# EAGLE board SparkFun Infrared Sensor STHS34PF80 Mini (EAGLE 9.6.2)
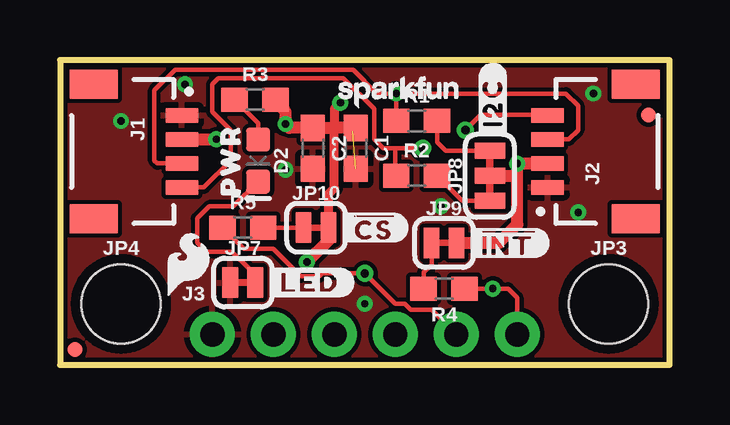
[diagram p0: board, top side]
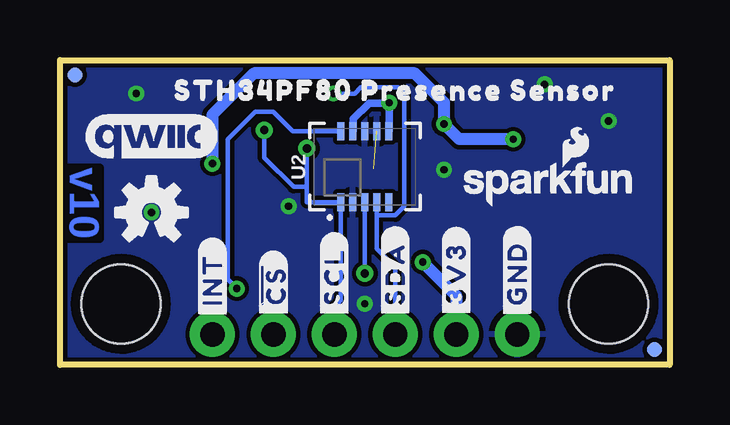
[diagram p1: board, bottom side, seen from below]

Size 25.4 x 12.7 mm. Coordinates in mm from the lower left corner, seen from the top.
Outline: 0,0 25.4,0 25.4,12.7 0,12.7 0,0
Copper layers (1*16): Top 0.035mm / dielectric 1.5mm / Bottom 0.035mm
Design rules "SparkFun-2-Layer-General-JLCPCB": minimum track width 7mil, minimum drill 0.3mm, track to track 7mil, track to pad 7mil, pad to pad 7mil, via to via 7mil, smd to smd 7mil, copper to edge 7mil, drill to drill 7mil, minimum pad ring 7mil, minimum via ring 7mil, stop-mask expansion 3mil, vias tented up to drill 25mil, thermal gap 10mil

## Footprints (pad centres in the part's own frame; a part is rotated, then mirrored left to right if it is on the bottom)
0603 = smd 1.1 x 1: 1 -0.85,0; 2 0.85,0
LED-0603 = smd 1 x 1: A -0.877,0; C 0.877,0
JST04_1MM_RA = smd 0.6 x 1.35: 1 -1.5,0; 2 -0.5,0; 3 0.5,0; 4 1.5,0 | smd 1.2 x 2: NC1 2.8,-3.675; NC2 -2.8,-3.675
1X06_NO_SILK = drill 1.016 pad 1.88: 1 0,0; 2 2.54,0; 3 5.08,0; 4 7.62,0; 5 10.16,0; 6 12.7,0
FIDUCIAL-MICRO = smd 0.635 x 0.635: 1 0,0
STAND-OFF = hole 3.302: 0,0
SMT-JUMPER_2_NC_TRACE_SILK = smd 0.66 x 1.27: 1 -0.521,0; 2 0.521,0
SMT-JUMPER_3_2-NC_TRACE_SILK = smd 0.66 x 1.27: 1 -1.041,0; 2 0,0; 3 1.041,0
OLGA-10L = smd 0.75 x 0.285: 1 -1.475,1; 2 -1.475,0.5; 3 -1.475,0; 4 -1.475,-0.5; 5 -1.475,-1; 6 1.475,-1; 7 1.475,-0.5; 8 1.475,0; 9 1.475,0.5; 10 1.475,1

## Placement (x,y rotation side)
C1  1.0uF  [0603]  12.32,9.02 270 top
C2  0.1uF  [0603]  10.54,9.02 270 top
D2  RED  [LED-0603]  8.26,8.51 270 top
FRAME1  FRAME-LETTER  [CREATIVE_COMMONS]  -3.81,-21.59 0 top  (outside the outline)
J1  Qwiic  [JST04_1MM_RA]  5.08,8.89 270 top
J2  Qwiic  [JST04_1MM_RA]  20.32,8.89 90 top
J3  [1X06_NO_SILK]  6.35,1.27 0 top
JP1  FIDUCIALUFIDUCIAL  [FIDUCIAL-MICRO]  0.64,0.64 0 top
JP2  FIDUCIALUFIDUCIAL  [FIDUCIAL-MICRO]  0.64,0.64 0 bottom
JP3  STAND-OFF  [STAND-OFF]  22.86,2.54 0 top
JP4  STAND-OFF  [STAND-OFF]  2.54,2.54 0 top
JP5  FIDUCIALUFIDUCIAL  [FIDUCIAL-MICRO]  24.77,12.06 0 bottom
JP6  FIDUCIALUFIDUCIAL  [FIDUCIAL-MICRO]  24.51,10.41 0 top
JP7  JUMPER-SMT_2_NC_TRACE_SILK  [SMT-JUMPER_2_NC_TRACE_SILK]  7.62,3.43 0 top
JP8  JUMPER-SMT_3_2-NC_TRACE_SILK  [SMT-JUMPER_3_2-NC_TRACE_SILK]  17.91,7.87 90 top
JP9  JUMPER-SMT_2_NC_TRACE_SILK  [SMT-JUMPER_2_NC_TRACE_SILK]  16,5.08 0 top
JP10  JUMPER-SMT_2_NC_TRACE_SILK  [SMT-JUMPER_2_NC_TRACE_SILK]  10.67,5.71 0 top
LOGO1  OSHW-LOGOS  [OSHW-LOGO-S]  21.59,6.35 0 bottom
LOGO2  SFE_LOGO_NAME_FLAME7_MM  [SFE_LOGO_NAME_FLAME_7MM]  5.08,7.62 0 bottom
LOGO3  QWIIC_LOGO_CONNECTOR  [QWIIC_5.5MM]  21.59,9.53 0 bottom
LOGO4  SFE_LOGO_NAME5_MM  [SFE_LOGO_NAME_5MM]  14.1,11.43 0 top
LOGO5  SPECIAL_INSTRUCTIONS-ORDERING  [ORDERING_INSTRUCTIONS]  69.85,49.53 0 top  (outside the outline)
LOGO6  SFE_LOGO_FLAME.1_INCH  [SFE_LOGO_FLAME_.1]  5.33,4.19 0 top
R1  2.2k  [0603]  14.86,10.16 0 top
R2  2.2k  [0603]  14.86,7.87 0 top
R3  4.7k  [0603]  8.13,11.05 0 top
R4  10k  [0603]  16,3.17 180 top
R5  10k  [0603]  7.62,5.71 0 top
U2  STHS34PF80  [OLGA-10L]  12.7,8.26 90 bottom
U$1  [#GND#4]  6.35,3.81 90 bottom
U$2  [#3V3#5]  8.89,3.81 90 bottom
U$3  [#SDA#5]  11.43,3.81 90 bottom
U$4  [#SCL#6]  13.97,3.68 90 bottom
U$5  [##CS#7]  16.51,3.3 90 bottom
U$6  [#INT#8]  19.05,3.56 90 bottom
U$7  [PWR9]  7.11,8.51 90 top
U$8  [#I2C#0]  18.03,10.92 90 top
U$9  [##CS#6]  13.08,5.71 0 top
U$10  [#LED#8]  10.41,3.43 0 top
U$11  [##INT#9]  18.67,5.08 0 top
U$12  [STH34PF80_PRESENCE_SENSOR10]  11.43,11.43 0 bottom

## Library data of the parts
C1 = SparkFun-Capacitors; PROD_ID: CAP-00868
C2 = SparkFun-Capacitors; PROD_ID: CAP-00810
D2 = SparkFun-LED; PROD_ID: DIO-17976
FRAME1 = SparkFun-Aesthetics; DESIGNER: N. Seidle; REV: v01
J1 J2 = SparkFun-Connectors; PROD_ID: CONN-13694
J3 = SparkFun-Connectors; PROD_ID: CONN-08437
JP1 JP2 JP5 JP6 LOGO1-LOGO6 = SparkFun-Aesthetics
JP3 JP4 = SparkFun-Hardware
JP7-JP10 = SparkFun-Jumpers
R1 R2 = SparkFun-Resistors; PROD_ID: RES-08272
R3 = SparkFun-Resistors; PROD_ID: RES-07857
R4 R5 = SparkFun-Resistors; PROD_ID: RES-00824
U2 = STHS34PF80; PROD_ID: IC-
U$1-U$12 = output

## Nets
3.3V: C1.1 C2.1 J1.2 J2.2 J3.2 JP8.2 JP9.2 JP10.2 R3.2 U2.6 U2.9
!CS!: J3.5 R5.1 U2.3
GND: C1.2 C2.2 J1.1 J2.1 J3.1 JP7.1 U2.2 U2.7 U2.8
INT: J3.6 R4.1 U2.10
N$1: D2.C JP7.2
N$2: JP8.3 R1.2
N$3: JP8.1 R2.2
N$4: D2.A R3.1
N$5: JP9.1 R4.2
N$6: JP10.1 R5.2
SCL: J1.4 J2.4 J3.4 R2.1 U2.1
SDA: J1.3 J2.3 J3.3 R1.1 U2.4

## Tracks (layer width: path | path; a pad name or v marks a point on that pad's centre or on a via)
3.3V  (via drill 0.3)
  Top 0.381: v11.68,10.92 11.43,10.67 11.43,9.87 11.43,7.37 11.19,7.12 JP10.2
  Top 0.508: J1.2 6.51,9.39 v6.51,9.4 | R3.2 8.98,10.96 9.4,10.54 v9.4,10.03 9.56,9.87 C2.1 11.43,9.87 C1.1 | JP9.2 18.29,5.08 19.06,5.85 v19.06,8.37 v19.05,8.38 | v10.29,4.28 10.65,4.65 10.66,4.65 11.19,5.18 JP10.2 | v19.05,8.38 v19.06,8.39 J2.2 | JP8.2 19.05,7.87 v19.05,8.38
  Bottom 0.305: U2.6 11.68,9.75 v11.68,10.92 | U2.9 13.17,9.76 13.17,10.24 12.51,10.91 11.7,10.91
  Bottom 0.381: 11.7,10.91 v11.68,10.92
  Bottom 0.508: v6.51,9.4 8.76,9.4 v9.4,10.03 9.4,10.92 10.62,12.14 17.32,12.14 19.05,10.41 v19.05,8.38 | v10.29,4.28 8.89,2.88 J3.2
!CS!  (via drill 0.35)
  Top 0.178: J3.5 15.49,2.29 14.62,2.29 14.37,2.54 13.97,2.54 v12.7,3.81 10.92,3.81 10.79,3.68 10.03,3.68 8.89,4.83 7.66,4.83 R5.1
  Bottom 0.178: U2.3 v12.7,3.81
GND  (via drill 0.3)  (1 unrouted)
  other vias: 21.59,6.35 9.4,8.13 5.21,11.68 12.7,2.54 15.88,6.6 22.23,11.3 2.54,10.16
  pour Top (isolate 0.127): 0,12.7 25.4,12.7 25.4,0 0,0
  pour Bottom (isolate 0.127): 0,0 0,12.7 25.4,12.7 25.4,0
INT  (via drill 0.3)
  Top 0.178: R4.1 v18.03,3.17 18.67,3.17 19.05,2.79 J3.6
  Bottom 0.178: U2.10 15.7,9.73 16.51,10.54 17.27,10.54 18.41,9.4 18.41,3.56 v18.03,3.17
N$1
  Top 0.178: 8.13,3.44 JP7.2 7.92,3.65 7.92,3.95 7.16,4.71 6.08,4.71 5.71,5.08 5.71,6.1 6.22,6.6 7.23,6.6 D2.C
N$2
  Top 0.178: R1.2 15.71,9.27 16.07,8.91 JP8.3
N$3
  Top 0.178: R2.2 16.75,6.83 JP8.1
N$4
  Top 0.178: R3.1 8.26,10.07 D2.A
N$5
  Top 0.178: R4.2 15.15,3.85 15.48,4.18 JP9.1
N$6
  Top 0.178: R5.2 JP10.1
SCL  (via drill 0.35)
  Top 0.178: 14.01,7.91 R2.1 13.97,7.91 13.97,9.02 | J2.4 20.3,10.41 17.53,10.41 v16.89,9.78 | v15.11,9.02 13.97,9.02 | 13.97,9.02 13.47,9.02 13.09,9.4 13.09,10.66 11.81,11.94 6.6,11.94 6.35,11.68 6.35,10.54 7.11,9.78 7.11,8.51 5.99,7.39 J1.4
  Bottom 0.178: J3.4 13.97,2.41 13.7,2.68 U2.1 15.11,6.78 15.11,7.42 | 15.11,7.42 15.67,7.42 16.89,8.64 v16.89,9.78 | v15.11,9.02 15.11,7.42
SDA  (via drill 0.3)
  Top 0.178: R1.1 v14.01,11.3 | J2.3 21.2,9.39 21.59,9.78 21.59,10.79 21.08,11.3 v14.01,11.3 | v14.01,11.3 13.21,11.3 12.22,12.29 4.8,12.29 3.94,11.43 3.94,8.51 4.06,8.39 J1.3
  Bottom 0.178: J3.3 11.43,4.06 12.2,4.83 12.2,6.22 | 12.2,6.22 U2.4 | v14.01,11.3 13.12,11.3 12.87,11.56 11.3,11.56 11.05,11.3 11.05,6.6 11.43,6.22 12.2,6.22

## Text on the board
Bottom: v10
tDocu: M. Chodikov